# Altium PCB CH32V307V-R1-1v0.PcbDoc (part 1 of 2)
Units mil, origin at the board's own origin, x right, y up, seen from the top; angles counter-clockwise.
Board outline 2913.39 x 4072 mil, 2 copper layers (Top Layer, Bottom Layer); 76 components, 135 nets, 475 pads, 552 vias.
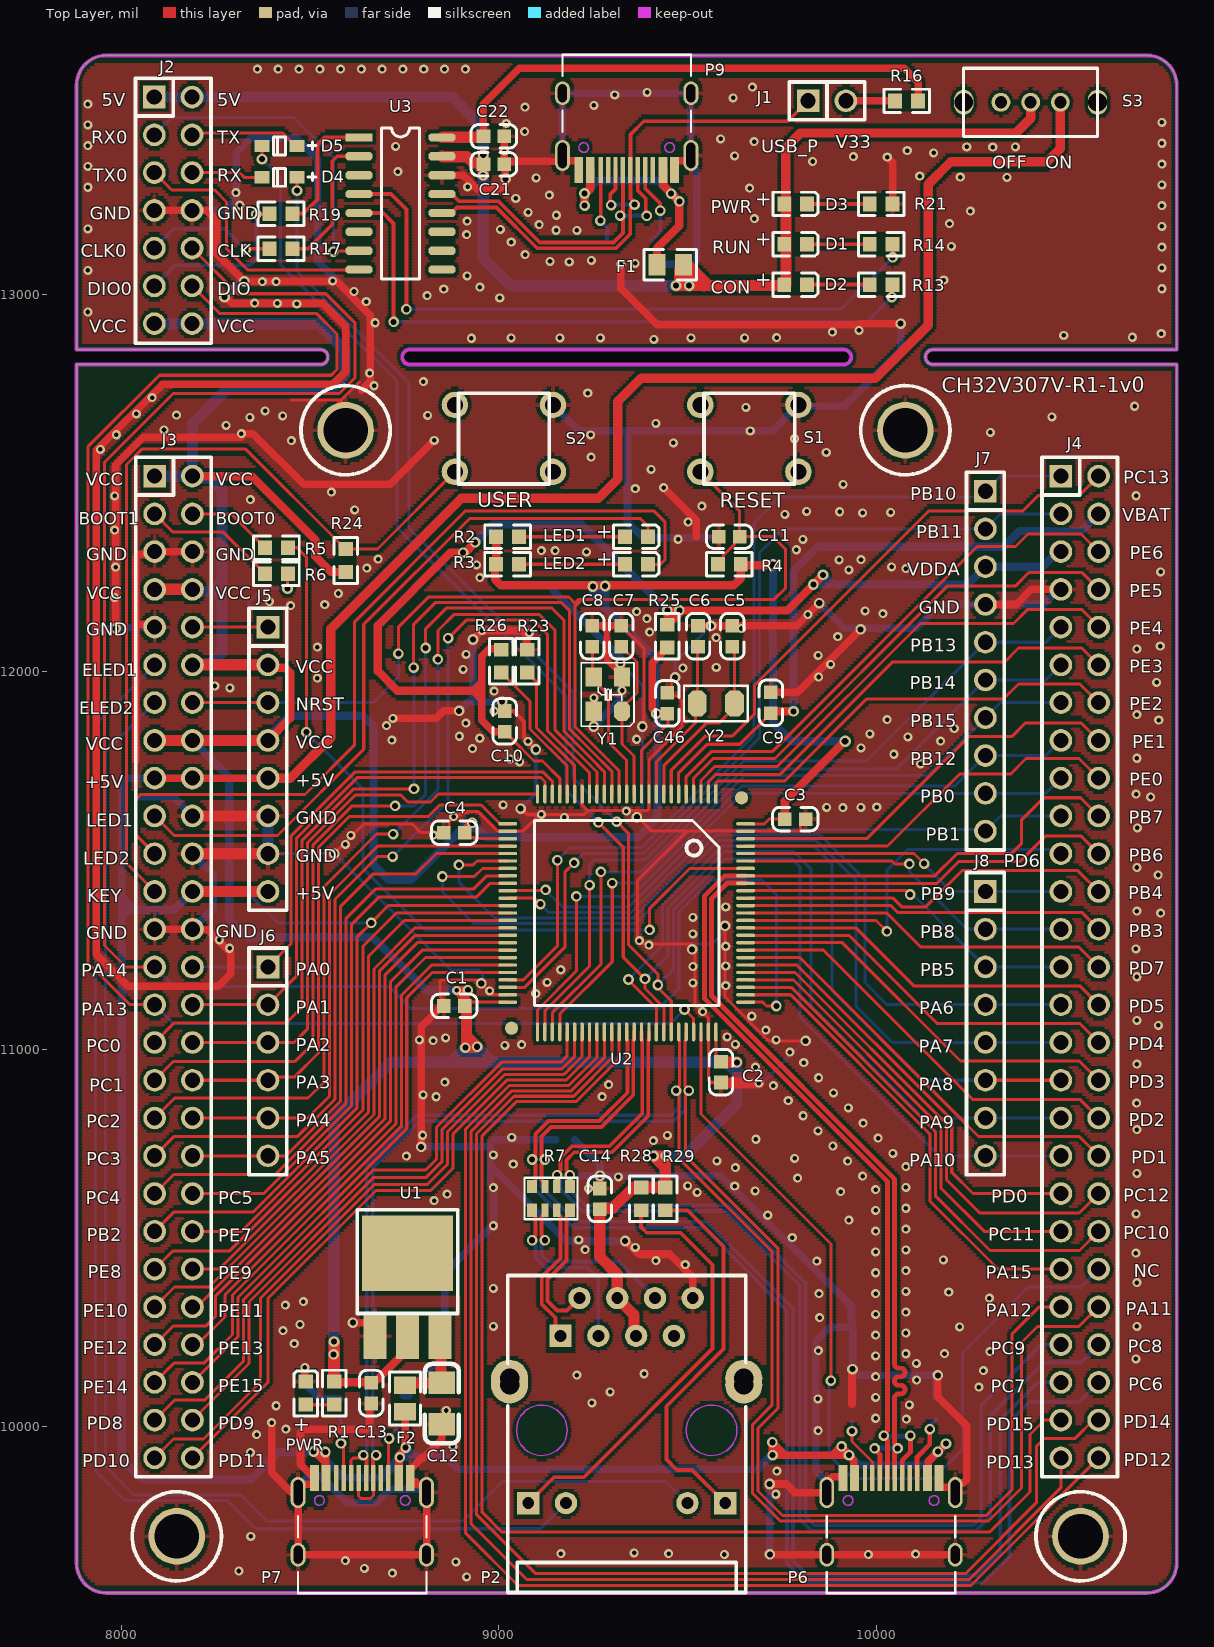
[diagram p0: Top Layer view]
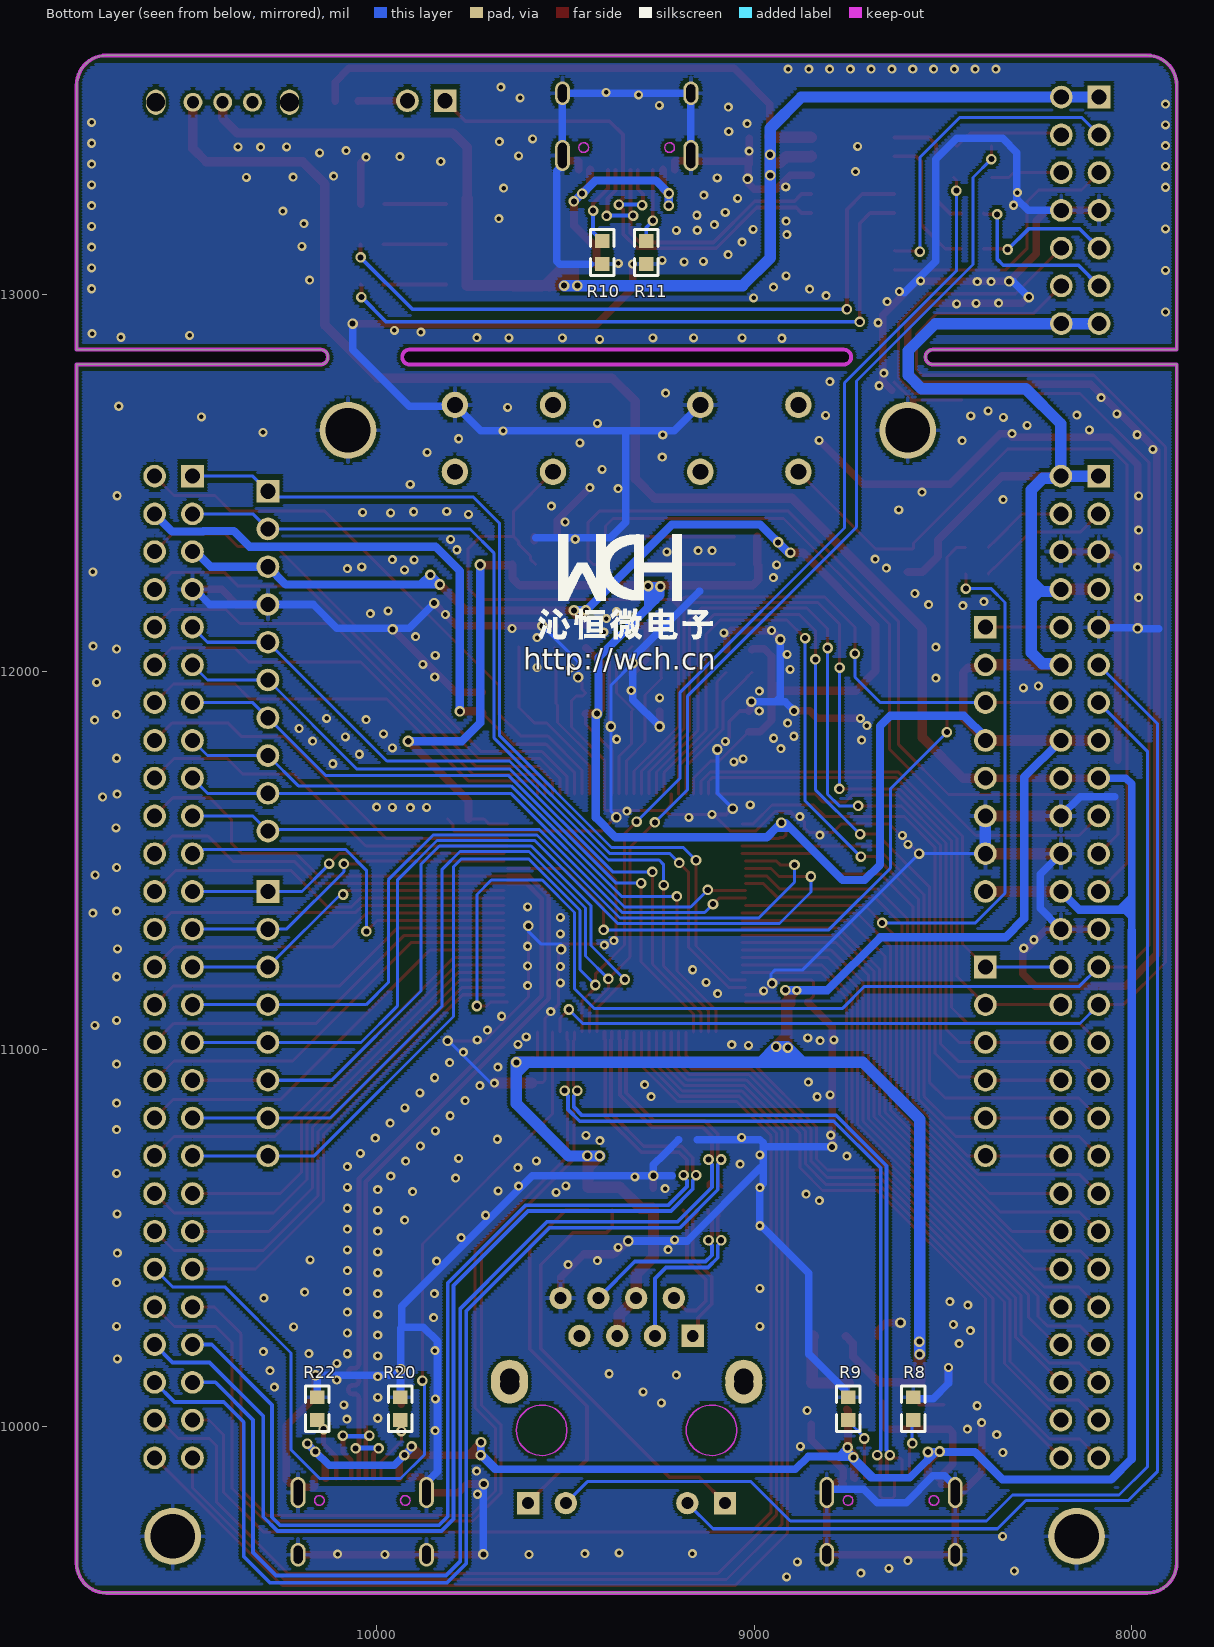
[diagram p1: Bottom Layer view, seen from below]

## Layer stack, top to bottom
Top Solder: solder mask 0.4, Solder Resist, Dk 3.5
Top Layer: signal copper 1.4
Dielectric 1: dielectric 12.6, FR-4, Dk 4.8
Bottom Layer: signal copper 1.4
Bottom Solder: solder mask 0.4, Solder Resist, Dk 3.5

## Board outline
7960.24,9560.3 cw(c7960.24,9639.04) 7881.5,9639.04 7881.5,12813.78 8527.17,12813.78 ccw(c8527.17,12833.46) 8527.17,12853.15 7881.5,12853.15 7881.5,13553.56 cw(c7960.24,13553.56) 7960.24,13632.3 10716.14,13632.3 cw(c10716.14,13553.56) 10794.88,13553.56 10794.88,12853.15 10149.21,12853.15 ccw(c10149.21,12833.46) 10149.21,12813.78 10794.88,12813.78 10794.88,9639.04 cw(c10716.14,9639.04) 10716.14,9560.3
cut-out: 8763.39,12813.78 9914.95,12813.78 9912.99,12813.68 ccw(c9912.99,12833.46) 9912.99,12853.25 9914.95,12853.15 8763.39,12853.15 ccw(c8763.39,12833.46)

## Design rules (kind name [scope] priority, off if disabled: settings)
Clearance Clearance_1 [InPolygon] p1: gap=8 ignorepadtopadclearanceinfootprint=FALSE
Clearance [All] p2: gap=5.5 ignorepadtopadclearanceinfootprint=FALSE
ComponentClearance [All] p1 off: gap=10 collisioncheckmode=3 verticalgap=10 showdistances=FALSE
DiffPairsRouting [All] p1: maxlimit=10 minlimit=5.5 mostfreqgap=8 toplayer_minwidth=6 toplayer_maxwidth=15 toplayer_prefwidth=10 bottomlayer_minwidth=6 bottomlayer_maxwidth=15 bottomlayer_prefwidth=10 maxuncoupledlength=500
MinimumSolderMaskSliver [All] p1 off: minsoldermaskwidth=10
PolygonConnect PolygonConnect_1 [IsVia] p1: connectstyle=Direct reliefconductorwidth=10 reliefentries=4 polygonreliefangle="90 Angle" airgapwidth=10
PolygonConnect [All] p2: connectstyle=Relief reliefconductorwidth=10 reliefentries=4 polygonreliefangle="90 Angle" airgapwidth=10
RoutingVias [All] p1: holewidth=16 width=28 viastyle="Through Hole" minholewidth=12 minwidth=24 maxholewidth=28 maxwidth=50
SilkToSilkClearance [All] p1 off: silktosilkclearance=10
SilkToSolderMaskClearance [IsPad] p1 off: minsilkscreentomaskgap=10 clearancetoexposedcopper=TRUE
SolderMaskExpansion [All] p1: expansion=4 istentingtop=FALSE
Width [All] p1: maxlimit=100 minlimit=6 preferedwidth=10
25 further rules are at their usual default settings.

## Classes and differential pairs
component class CH32V307V-R1-1v0: C1 C2 C3 C4 C5 C6 C7 C8 C9 C10 C11 C12 C13 C14 C21 C22 C46 D1 D2 D3 D4 D5 F1 F2 J1 J2 J3 J4 J5 J6 J7 J8 LED1 LED2 P2 P6 P7 P9 PWR R1 R2 R3 R4 R5 R6 R7 R8 R9 R10 R11 R13 R14 R16 R17 R19 R20 R21 R22 R23 R24 R25 R26 R28 R29 S1 S2 S3 U1 U2 U3 Y1 Y2
differential pair ETX: +ETXP -ETXN
differential pair ERX: +ERXP -ERXN
differential pair ERX1: +ERXP1 -ERXN1
differential pair ETX1: +ETXN1 -ETXP1
differential pair NewDifferentialPair2: +PA11 -PA12
differential pair NewDifferentialPair1: +PB6 -PB7

## Components (designator, comment, footprint, x,y, rotation, side; value= is the part's Value field where it differs from the comment)
C1 "0.1uF" 0603_C 8854.17,11114.89 r0 top
C2 "0.1uF" 0603_C 9588.03,10912.26 r90 top
C3 "0.1uF" 0603_C 9757.17,11609.89 r0 top
C4 "0.1uF" 0603_C 8854.17,11573.89 r0 top
C5 "12pF" 0603_C 9618.17,12066.71 r90 top
C6 "12pF" 0603_C 9527.17,12066.71 r90 top
C7 "20pF" 0603_C 9324.17,12121.69 r270 top
C8 "20pF" 0603_C 9247.17,12121.69 r270 top
C9 "0.1uF" 0603_C 9720.24,11945.17 r270 top
C10 "0.1uF" 0603_C 9015.02,11896.03 r270 top
C11 "0.1uF" 0603_C 9582.49,12357.58 r0 top
C12 "10uF" 3216_C 8848.89,10116.83 r90 top
C13 "2.2uF" 0603_C 8661.71,10117.14 r270 top
C14 "1uF" 0603_C 9267.28,10631.55 r270 top
C21 "0.1uF" 0603_C 8958.96,13344.22 r0 top
C22 "0.1uF" 0603_C 8958.96,13417.98 r0 top
C46 "0.1uF" 0603_C 9446.17,11888.9 r90 top
D1 "GREEN" 0603+ 9755.46,13132.07 r0 top
D2 "BLUE" 0603+ 9755.46,13025.32 r0 top
D3 "RED" 0603+ 9755.46,13238.82 r0 top
D4 "B0520" SOD-323 8465.46,13309.41 r180 top
D5 "B0520" SOD-323 8465.46,13392.36 r180 top
F1 "500mA" 0805 9418.33,13077.94 r0 top
F2 "500mA" 0805 8751.22,10040.36 r90 top
J1 "Header 2" SIP2-2.54MM 9818.79,13512.1 r90 top
J2 "Header 7X2" IDC14-2.54mm 8087.19,13522 r0 top
J3 "HEADER 27x2" IDC54-2.54MM 8088.19,12518.11 r0 top locked
J4 "HEADER 27x2" IDC54-2.54MM 10488.19,12518.11 r0 top locked
J5 "Header 8" SIP8-2.54mm 8388.19,12118.11 r0 top locked
J6 "Header 6" SIP6-2.54MM 8388.19,11218.11 r0 top locked
J7 "Header 10" SIP10-2.54mm 10288.19,12478.11 r0 top locked
J8 "Header 8" SIP8-2.54mm 10288.19,11418.11 r0 top locked
LED1 "LED1   blue" 0603+ 9333.89,12357.58 r0 top
LED2 "LED2  blue" 0603+ 9333.89,12284.43 r0 top
P2 "HR911105A" HR911105A 9163.19,10241.2 r0 top
P6 "USBHS" TYPE-C-Receptacle-2.0 10038.31,9864.31 r0 top
P7 "USBFS" TYPE-C-Receptacle-2.0 8638.07,9864.31 r0 top
P9 "TYPE-C" TYPE-C-Receptacle-2.0 9338.19,13329.24 r180 top
PWR "POWER  red" 0603+ 8488.6,10059.33 r90 top
R1 "1K" 0603 8563.58,10059.33 r90 top
R2 "1K" 0603 8992.46,12357.58 r0 top
R3 "1K" 0603 8992.46,12284.43 r0 top
R4 "10K" 0603 9579.67,12284.43 r0 top
R5 "10K" 0603 8380.33,12328.46 r0 top
R6 "10K" 0603 8440.96,12259.29 r180 top
R7 "0Ω" RCA-8P4R-0603 9137.7,10605.1 r180 top
R8 "NC(5.1K)" 0603 8578.92,10078.77 r270 bottom
R9 "NC(5.1K)" 0603 8751.9,10078.77 r270 bottom
R10 "NC(5.1K)" 0603 9402.41,13140.64 r270 bottom
R11 "NC(5.1K)" 0603 9286.47,13140.64 r270 bottom
R13 "1K" 0603 10042.48,13025.32 r180 top
R14 "10K" 0603 10042.48,13132.07 r180 top
R16 "4.7K" 0603 10049.21,13511.61 r0 top
R17 "270" 0603 8392.31,13120.22 r0 top
R19 "270" 0603 8392.31,13213.47 r0 top
R20 "NC(5.1K)" 0603 9937.83,10078.77 r270 bottom
R21 "1K" 0603 10042.48,13238.82 r180 top
R22 "NC(5.1K)" 0603 10157.21,10078.77 r270 bottom
R23 "0R" 0603 9074.6,12058.4 r270 top
R24 "10K" 0603 8593.69,12324.84 r270 top
R25 "0R" 0603 9446.17,12063.89 r90 top
R26 "0R" 0603 9006.35,12058.4 r270 top
R28 "1K" 0603 9376.51,10634.37 r270 top
R29 "1K" 0603 9440.75,10634.37 r270 top
S1 "RESET" KEYX 9533.27,12529.53 r90 top locked
S2 "USER" KEYX 8883.27,12529.53 r90 top locked
S3 "SW" KEY2 10250.62,13508.22 r0 top
U1 "1117-3.3V" SOT-223 8671.73,10240.25 r0 top
U2 "CH32V307V" LQFP100 9574.41,11676.04 r180 top locked
U3 "CH549G" SOP16 8629.36,13415.06 r270 top
Y1 "8M" XT3225 9325.98,11895.34 r90 top
Y2 "32.768k" FC-135 9623.6,11915.89 r180 top
? "Comment" HOLE 8593.78,12639.72 r0 top
? "Comment" HOLE 10076.22,12639.72 r0 top
? "Comment" HOLE 8146.7,9710.31 r0 top
? "Comment" HOLE 10540.23,9710.31 r0 top

## Footprints (in the part's own frame and the unit in brackets; to place one, negate y for a bottom-side part, rotate by r counter-clockwise, add the part's x,y. Pads: shape width x height; smd on the part's side, far side on the other; paste and mask are expansions set on the pad)
0603 [mm]
  rect 0.93x0.98 smd: 1(0,0) 2(1.54,0)
  silkscreen extent -0.76,-0.79 2.3,0.79
0603+ [mm]
  rect 0.93x0.98 smd: 1(0,0) 2(1.54,0)
  silkscreen extent -0.76,-0.79 2.27,0.79
0603_C [mil]
  rect 36x36 smd: 1(0,0) 2(55,0)
  silkscreen extent -33,-31 88,31
0805 [mm]
  rect 1.16x1.47 smd: 1(0,0) 2(1.78,0)
  silkscreen extent -0.88,-1.04 2.66,1.03
3216_C [mil]
  rect 60x70 smd: 1(0,0) 2(-110,0)
  silkscreen extent -160,-45 50,45
FC-135 [mil]
  oct 50x70 smd: 1(0,0) 2(98.43,0)
  silkscreen extent -35,-47 133,47
HOLE [mm]
  round 3.81 hole 3: 0(0,0)
  silkscreen extent -3,-3 3,3
HR911105A [mm]
  rect 1.5x1.5 hole 0.8: 1(0,0) 9(-2.175,-11.252) 12(11.075,-11.252)
  round 1.5 hole 0.8: 2(1.27,2.54) 3(2.54,0) 4(3.81,2.54) 5(5.08,0) 6(6.35,2.54) 7(7.62,0) 8(8.89,2.54) 10(0.365,-11.252) 11(8.535,-11.252)
  round 2.5 hole 1.3: ""(-3.43,-2.852) ""(-3.43,-3.3) ""(12.32,-3.3) ""(12.32,-2.852)
  Keep-Out Layer circle w0.1: c-1.265,-6.352 r1.7
  Keep-Out Layer circle w0.1: c10.165,-6.352 r1.7
  silkscreen extent -3.55,-17.27 12.45,4.06
IDC14-2.54mm [mil]
  rect 60x60 hole 40: 1(0,0)
  round 60 hole 40: 2(100,0) 3(0,-100) 4(100,-100) 5(0,-200) 6(100,-200) 7(0,-300) 8(100,-300) 9(0,-400) 10(100,-400) 11(0,-500) 12(100,-500) 13(0,-600) 14(100,-600)
  silkscreen extent -50,-652 151,50
IDC54-2.54MM [mil]
  rect 60x60 hole 40: 1(0,0)
  round 60 hole 40: 2(100,0) 3(0,-100) 4(100,-100) 5(0,-200) 6(100,-200) 7(0,-300) 8(100,-300) 9(0,-400) 10(100,-400) 11(0,-500) 12(100,-500) 13(0,-600) 14(100,-600) 15(0,-700) 16(100,-700) 17(0,-800) 18(100,-800) 19(0,-900) 20(100,-900) 21(0,-1000) 22(100,-1000) 23(0,-1100) 24(100,-1100) 25(0,-1200) 26(100,-1200) 27(0,-1300) 28(100,-1300) 29(0,-1400) 30(100,-1400) 31(0,-1500) 32(100,-1500) 33(0,-1600) 34(100,-1600) 35(0,-1700) 36(100,-1700) 37(0,-1800) 38(100,-1800) 39(0,-1900) 40(100,-1900) 41(0,-2000) 42(100,-2000) 43(0,-2100) 44(100,-2100) 45(0,-2200) 46(100,-2200) 47(0,-2300) 48(100,-2300) 49(0,-2400) 50(100,-2400) 51(0,-2500) 52(100,-2500) 53(0,-2600) 54(100,-2600)
  silkscreen extent -50,-2650 150,50
KEY2 [mm]
  oval 1.3x1.7 hole 1.27: 0(-0.5,0) 0(8.5,0)
  round 1.27 hole 0.813: 1(4,0) 2(2,0) 3(6,0)
  silkscreen extent -0.51,-2.31 8.5,2.29
KEYX [mil]
  round 70 hole 42: 1(0,0) 2(0,-259.84) 3(177.17,-259.84) 4(177.17,0)
  silkscreen extent -32,-250 208,-10
LQFP100 [mm]
  round 0.889 smd: 0(-1.727,0.254) 0(13.746,15.748)
  rect 0.229x1.27 smd: 1(0,0)
  oval 0.229x1.27 smd: 2(0.5,0) 3(1,0) 4(1.5,0) 5(2,0) 6(2.5,0) 7(3,0) 8(3.5,0) 9(4,0) 10(4.5,0) 11(5,0) 12(5.5,0) 13(6,0) 14(6.5,0) 15(7,0) 16(7.5,0) 17(8,0) 18(8.5,0) 19(9,0) 20(9.5,0) 21(10,0) 22(10.5,0) 23(11,0) 24(11.5,0) 25(12,0) 51(12,16) 52(11.5,16) 53(11,16) 54(10.5,16) 55(10,16) 56(9.5,16) 57(9,16) 58(8.5,16) 59(8,16) 60(7.5,16) 61(7,16) 62(6.5,16) 63(6,16) 64(5.5,16) 65(5,16) 66(4.5,16) 67(4,16) 68(3.5,16) 69(3,16) 70(2.5,16) 71(2,16) 72(1.5,16) 73(1,16) 74(0.5,16) 75(0,16)
  oval 1.27x0.229 smd: 26(14,2) 27(14,2.5) 28(14,3) 29(14,3.5) 30(14,4) 31(14,4.5) 32(14,5) 33(14,5.5) 34(14,6) 35(14,6.5) 36(14,7) 37(14,7.5) 38(14,8) 39(14,8.5) 40(14,9) 41(14,9.5) 42(14,10) 43(14,10.5) 44(14,11) 45(14,11.5) 46(14,12) 47(14,12.5) 48(14,13) 49(14,13.5) 50(14,14) 76(-2,14) 77(-2,13.5) 78(-2,13) 79(-2,12.5) 80(-2,12) 81(-2,11.5) 82(-2,11) 83(-2,10.5) 84(-2,10) 85(-2,9.5) 86(-2,9) 87(-2,8.5) 88(-2,8) 89(-2,7.5) 90(-2,7) 91(-2,6.5) 92(-2,6) 93(-2,5.5) 94(-2,5) 95(-2,4.5) 96(-2,4) 97(-2,3.5) 98(-2,3) 99(-2,2.5) 100(-2,2)
  silkscreen extent -0.22,1.79 12.21,14.21
RCA-8P4R-0603 [mm]
  rect 0.65x0.9 smd: 1(-1.28,-0.8) 4(1.28,-0.8) 5(1.28,0.8) 8(-1.28,0.8)
  rect 0.5x0.9 smd: 2(-0.4,-0.8) 3(0.4,-0.8) 6(0.4,0.8) 7(-0.4,0.8)
  silkscreen extent -1.78,-1.4 1.78,1.4, body extent -1.6,-0.8 1.6,0.8, height 0.6
SIP2-2.54MM [mil]
  rect 60x60 hole 40: 1(0,0)
  round 60 hole 40: 2(0,-100)
  silkscreen extent -50,-150 50,50
SIP6-2.54MM [mil]
  rect 60x60 hole 40: 1(0,0)
  round 60 hole 40: 2(0,-100) 3(0,-200) 4(0,-300) 5(0,-400) 6(0,-500)
  silkscreen extent -50,-550 50,50
SIP8-2.54mm [mil]
  rect 60x60 hole 40: 1(0,0)
  round 60 hole 40: 2(0,-100) 3(0,-200) 4(0,-300) 5(0,-400) 6(0,-500) 7(0,-600) 8(0,-700)
  silkscreen extent -50,-750 50,50
SIP10-2.54mm [mil]
  rect 60x60 hole 40: 1(0,0)
  round 60 hole 40: 2(0,-100) 3(0,-200) 4(0,-300) 5(0,-400) 6(0,-500) 7(0,-600) 8(0,-700) 9(0,-800) 10(0,-900)
  silkscreen extent -50,-950 50,50
SOD-323 [mm]
  rect 1x0.83 smd: 1(0,0) 2(2.36,0)
  silkscreen extent -1.28,-0.6 1.58,0.6
SOP16 [mil]
  rect 22x72 smd: 1(0,0)
  oct 22x72 smd: 2(50,0) 3(100,0) 4(150,0) 5(200,0) 6(250,0) 7(300,0) 8(350,0) 9(350,220) 10(300,220) 11(250,220) 12(200,220) 13(150,220) 14(100,220) 15(50,220) 16(0,220)
  silkscreen extent -25,60 375,160
SOT-223 [mil]
  rect 60x120 smd: 1(0,0) 2(86,0) 3(172,0)
  rect 240x200 smd: ""(86,220)
  silkscreen extent -47,60 219,335
TYPE-C-Receptacle-2.0 [mm]
  oval 1x1.6 hole 0.6 slot 1.2 at 90 deg: 0(-4.32,-5.15) 0(4.32,-5.15)
  oval 1x2.1 hole 0.6 slot 1.7 at 90 deg: 0(-4.32,-0.97) 0(4.32,-0.97)
  rect 0.6x1.75 smd: A1(-3.225,0) A4(-2.45,0) B1(3.225,0) B4(2.45,0)
  rect 0.3x1.75 smd: A5(-1.25,0) A6(-0.25,0) A7(0.25,0) A8(1.25,0) B5(1.75,0) B6(0.75,0) B7(-0.75,0) B8(-1.75,0)
  Keep-Out Layer circle w0.1: c2.89,-1.5 r0.325
  Keep-Out Layer circle w0.1: c-2.89,-1.5 r0.325
  silkscreen extent -4.32,-7.75 4.32,-2.55
XT3225 [mm]
  oct 1.3x1.1 smd: 1(0,0)
  rect 1.3x1.1 smd: 2(2.3,0) 3(2.3,1.9) 4(0,1.9)
  silkscreen extent -1.02,-0.8 3.27,2.74

## Part data
C1 C2 C3 C4 C9 C10 C12 C13 C14 C46: library part CAP, "Capacitor"
C5 C6 C7 C8 C11: library part Cap, "Capacitor"
C21 C22: library part C0603, "Capacitor", LatestRevisionDate=17-Jul-2002, LatestRevisionNote="Re-released for DXP Platform.", PackageDescription="Radial Cap, Thru-Hole; 2 Leads; 0.3 in Pin Spacing", PackageReference=RAD-0.3, Published=8-Jun-2000, Publisher="Altium Limited"
D1 D2 D3: library part D0603, "Typical RED, GREEN, YELLOW, AMBER GaAs LED", LatestRevisionDate=17-Jul-2002, LatestRevisionNote="Re-released for DXP Platform.", PackageDescription="SM LED; 2 Flat Leads", PackageReference=3.2X1.6X1.1, PackageVersion=Feb-2002, Published=8-Jun-2000, Publisher="Altium Limited"
D4 D5: library part DIODE, "Diode"
F1 F2: library part FUSE1, "Fuse"
J1: "Header, 2-Pin", LatestRevisionDate=17-Jul-2002, LatestRevisionNote="Re-released for DXP Platform.", Publisher="Altium Limited"
J2: "Header, 7-Pin, Dual row", LatestRevisionDate=17-Jul-2002, LatestRevisionNote="Re-released for DXP Platform.", Publisher="Altium Limited"
J3 J4: "Header, 27-Pin, Dual row"
J5 J8: "Header, 8-Pin", LatestRevisionDate=17-Jul-2002, LatestRevisionNote="Re-released for DXP Platform.", Publisher="Altium Limited"
J6: "Header, 6-Pin", LatestRevisionDate=17-Jul-2002, LatestRevisionNote="Re-released for DXP Platform.", Publisher="Altium Limited"
J7: "Header, 10-Pin", LatestRevisionDate=17-Jul-2002, LatestRevisionNote="Re-released for DXP Platform.", Publisher="Altium Limited"
LED1 LED2 PWR: library part LED0, "Typical INFRARED GaAs LED", LatestRevisionDate=08-Jul-2005, LatestRevisionNote="Mech Layer 1 removed.", PackageReference=LED-0, Published=8-Jun-2000, Publisher="Altium Limited"
P6 P7 P9: library part TYPE-C1
R1 R2 R3: library part "Res Semi", "Semiconductor Resistor"
R4 R5 R6 R8 R9 R10 R11 R20 R22 R24: library part Res2, "Resistor"
R7: library part R-8P4R, "贴片网络排阻", BOM名称=贴片网络排阻, 学习资源=www.ooocke.com, 版权归属=源创客
R13 R14 R16 R17 R19 R21: library part R0603, "Resistor", LatestRevisionDate=17-Jul-2002, LatestRevisionNote="Re-released for DXP Platform.", PackageDescription="Axial Device, Thru-Hole; 2 Leads; 0.3 in Pin Spacing", PackageReference=AXIAL-0.3, Published=8-Jun-2000, Publisher="Altium Limited"
R23 R25 R26: library part R
R28 R29: library part RES
S1 S2: library part "SW PUSHBUTTON", "SE PUSHBUTTON"
U2: "RISC-V FPU MCU, 144MHz, USB_480M，USB OTG,1000M Ethernet MAC, 2*CAN"
U3: "8bit MCS51 MCU with ADC & USB type-C host & device & dual UART & SPI"
Y1 Y2: library part XTAL, "Crystal Oscillator", LatestRevisionDate=17-Jul-2002, LatestRevisionNote="Re-released for DXP Platform.", PackageReference=R38, Published=8-Jun-2000, Publisher="Altium Limited"

## Via types
v1: diameter 24, hole 12, Top Layer to Bottom Layer, tented both sides, 414 vias
v2: diameter 28, hole 16, Top Layer to Bottom Layer, tented both sides, 136 vias
v3: diameter 30, hole 18, Top Layer to Bottom Layer, tented both sides, 2 vias

## Nets (pads, with @x,y where several pads share a name; then routed paths per layer and width w, separated by ;. In a path a pad name is that pad's centre, name@x,y a point inside that pad or via, vN(x,y) a via of type N, cw(c..) or ccw(c..) an arc to the next point about the centre after c; other vN are vias at no path point)
5V: C21.1 D1.1 D2.1 D3.1 F1.2 J2.1 J2.2 S3.1 U3.15 | length 3722
  Top Layer w25: D3.1@9760.03,13253.45 9760.03,13388.54 9798.31,13426.82 10369.41,13426.82 10408.1,13465.5 S3.1@10408.1,13508.22
  Top Layer w30: U3.15@8849.36,13365.06 8850.39,13364.03 8915.36,13364.03 8932.18,13347.22 8955.96,13347.22 C21.1@8957.96,13345.22 ; v2(8957.96,13314.42) C21.1@8957.96,13343.23 ; v2(8958.42,13369.17) 8957.96,13368.71 C21.1@8957.96,13345.22 ; v2(9468.77,13022.53) v2@9469.19,13022.96 ; 9484.12,13037.88 9484.12,13065.59 F1.2@9491.95,13073.43 ; v2(9503.72,13022.55) v2@9503.72,13022.96 ; 9503.72,13037.1 v2@9503.72,13031.43 ; 9563.77,13022.53 9637.73,13022.53 ; D3.1@9760.03,13253.45 9760.03,13138.2 9760.03,13022.96 9554.63,13022.96 ; C21.1@8957.96,13343.23 C21.1@8957.96,13345.22 ; C21.1@8957.96,13343.23 C21.1@8958.96,13344.22 C21.1@8957.96,13345.22 ; v2@9469.19,13022.96 v2@9503.72,13022.96 ; v2@9469.19,13022.96 9479.12,13032.88 9479.12,13065.59 9486.95,13073.43 F1.2@9491.95,13073.43 ; F1.2@9491.95,13073.43 9493.06,13073.43 F1.2@9498.06,13073.43 ; F1.2@9498.06,13073.43 9504.16,13073.43 9542.73,13034.85 ; F1.2@9498.06,13073.43 9501.38,13070.1 9501.38,13033.77 v2@9503.72,13031.43 ; v2@9503.72,13022.96 v2@9512.2,13022.96 ; v2@9503.72,13022.96 v2@9503.72,13031.43 ; v2@9503.72,13031.43 v2@9512.2,13022.96 ; v2@9512.2,13022.96 9542.73,13022.96 ; 9542.73,13022.96 9543.16,13022.96 ; 9542.73,13022.96 9542.73,13034.85 ; 9542.73,13022.96 9542.73,13022.53 9543.16,13022.96 ; 9542.73,13034.85 9554.63,13022.96 ; 9543.16,13022.96 9554.63,13022.96
  Bottom Layer w30: J2.1@8087.19,13522 J2.2@8187.19,13522 8875.41,13522 8957.96,13439.44 v2(8957.96,13314.42) 8957.96,13095.71 9031.12,13022.55 v2(9503.72,13022.55)
5V_USB: F1.1 P9.A4 P9.B4 | length 727.3
  Top Layer w22: v2(9226.58,13266.5) 9227.73,13267.64 9230.45,13267.64 9241.73,13278.93 P9.B4@9241.73,13329.24 ; v2(9226.75,13234.23) v2@9226.75,13266.5 ; F1.1@9418.33,13077.94 9418.33,13122.08 9477.78,13181.53 v2(9477.78,13246) 9476.88,13246 9457.95,13264.94 9457.05,13264.94 v2(9455.9,13266.08) 9455.9,13267.71 9435.46,13288.15 9435.46,13328.43 P9.A4@9434.65,13329.24
  Bottom Layer w22: v2(9226.58,13266.5) v2@9226.75,13266.67 ; v2(9226.75,13234.23) v2@9226.75,13266.67 ; v2@9447.49,13272.04 v2@9449.94,13272.04 ; v2@9451.75,13272.04 v2(9477.78,13246) ; v2(9455.9,13266.08) v2@9449.94,13272.04 ; v2@9226.75,13266.67 9260.88,13300.79 9421.19,13300.79 v2@9449.94,13272.04
+5V: F2.1 J3.17 J3.18 J3.24 J5.5 J5.8 P6.A4 P6.B4 P7.A4 P7.B4 S3.3 | length 9527.6
  Top Layer w20: J3.17@8088.19,11718.11 J3.18@8188.19,11718.11 J5.5@8388.19,11718.11 ; v2(8509.23,9934.97) 8510.66,9934.97 8539.81,9905.83 ; v2@8512.09,9934.28 8539.48,9934.28 v2(8540.17,9933.58) 8540.89,9932.86 P7.A4@8540.89,9865.03 ; 8539.81,9909.12 8539.81,9905.83 ; P7.A4@8541.62,9864.31 P7.A4@8540.89,9865.03 ; v2(8737.76,9919.26) 8736.34,9917.84 8736.34,9866.12 P7.B4@8734.53,9864.31 8734.53,9925.11 8752.75,9943.33 v2(8752.75,9945.49) 8751.98,9946.26 8751.98,10043.5 F2.1@8754.88,10046.39 ; v2(9723.98,9959.44) v2@9724.44,9958.98 ; P6.A4@9941.85,9864.31 9940.04,9866.12 9940.04,9911.59 9927.06,9924.57 v2(9927.06,9925.39) ; P6.B4@10134.77,9864.31 10136.58,9866.12 10136.58,9907.65 ; v2(10162.43,9934.68) 10136.58,9908.82 10136.58,9907.65 ; v2(10184,9956) 10184,9955.07 10136.58,9907.65 ; 8539.81,9905.83 8539.81,9866.12 P7.A4@8540.89,9865.03 ; v2@9724.44,9958.98 9757.93,9925.49 ; v2@9724.44,9958.98 9724.44,9925.95 v2(9724.9,9925.49) 9757.93,9925.49 ; 9757.93,9925.49 9882.45,9925.49 ; 9882.45,9925.49 9926.96,9925.49 v2(9927.06,9925.39) ; 9882.45,9925.49 9905.39,9948.43 v2(9907.56,9948.43) 9907.56,9946.66 9927.06,9927.16 v2(9927.06,9925.39)
  Top Layer w25: J5.5@8388.19,11718.11 8447.22,11718.11 8554.83,11825.72 8554.83,12113.72 8900.51,12459.4 9263.58,12459.4 9315.12,12510.94 9315.12,12716.19 9376.31,12777.38 9996.85,12777.38 10137.45,12917.98 10137.45,13291.4 10196.53,13350.48 10451.5,13350.48 10486.84,13385.81 S3.3@10486.84,13508.22
  Top Layer w30: J3.24@8188.19,11418.11 J5.8@8388.19,11418.11
  Bottom Layer w20: 8000.75,11314.66 8000.75,11351.37 ; 8033.82,11369.98 8000.75,11403.05 ; J3.17@8088.19,11718.11 8087.85,11718.45 8016.2,11718.45 8000.75,11702.99 8000.75,11403.05 ; v2(8540.17,9933.58) 8540.17,9913.36 8588.12,9865.41 8691.69,9865.41 v2@8742.47,9916.2 ; 8686.03,9867.53 v2(8737.76,9919.26) ; v2(8752.75,9945.49) 8753.15,9945.49 v2@8756.55,9942.1 ; 8776.99,9919.26 v2(8737.76,9919.26) ; v2@9723.98,9936.06 9724.44,9936.52 9724.44,9958.98 v2(9723.98,9959.44) ; v2(9724.9,9925.49) v2@9720.9,9921.49 ; v2(9907.56,9948.43) 9907.56,9946.27 9910.5,9943.32 9910.5,9941.94 v2(9927.06,9925.39) 9953.88,9898.56 10126.31,9898.56 v2(10162.43,9934.68) 10162.68,9934.68 v2(10184,9956) ; 8000.75,11351.37 8000.75,11388.59 ; 8000.75,11351.37 8019.36,11369.98 8000.75,11388.59 ; 8000.75,11388.59 8000.75,11403.05 ; v2(8737.76,9919.26) 8737.76,9921.42 8756.55,9940.21 v2@8756.55,9942.1 ; v2@8756.55,9942.1 8776.99,9921.65 8857.24,9921.65 8891.13,9887.76 9682.27,9887.76 ; 9682.27,9887.76 9687.17,9887.76 v2@9720.9,9921.49 ; 9682.27,9887.76 9716,9921.49 v2@9720.9,9921.49
  Bottom Layer w22: 8000.75,11314.66 8000.75,9914.7 8054.82,9860.62 8343.32,9860.62 8416.28,9933.58 v2@8519.95,9933.58 ; 8019.36,11369.98 8033.82,11369.98 8140.06,11369.98 J3.24@8188.19,11418.11 ; 8540.17,9913.36 v2@8519.95,9933.58 ; v2(8540.17,9933.58) v2@8519.95,9933.58
BOOT0: R5.2 U2.94 | length 2126.8
  Top Layer w8: R5.2@8440.96,12328.46 8465.06,12328.46 8490,12303.52 v2(8490,11840) ; v2(9399.06,11316.56) 9399.06,11373.4 9504.85,11479.19 U2.94@9653.15,11479.19
  Bottom Layer w8: v2(8490,11840) 8639.57,11690.43 8639.57,11479.92 8802.92,11316.56 v2(9399.06,11316.56)
BOOT1: J3.41 R6.1 U2.37 | length 2844.9
  Top Layer w8: J3.41@8088.19,10518.11 8138.81,10568.73 8348.32,10568.73 8623.52,10843.92 8623.52,11296.64 v2(8661.72,11334.84) 8661.72,11335.59 8706.9,11380.76 U2.37@9023.23,11380.76 ; v2(8440,12220) 8440,12258.33 R6.1@8440.96,12259.29
  Bottom Layer w8: v2(8440,12220) 8372.58,12220 8336.08,12183.5 8336.08,11413.65 8414.89,11334.84 v2(8661.72,11334.84)
CLK: J2.10 J3.27 U2.76 | length 5198.6
  Top Layer w8: J3.27@8088.19,11218.11 8012.02,11218.11 7955.27,11274.86 7955.27,12554.56 8137.4,12736.68 8576.87,12736.68 8618.33,12778.15 8618.33,12924.38 8541.63,13001.08 8308.11,13001.08 J2.10@8187.19,13122 ; U2.76@9653.15,11124.86 9698.54,11124.86 9708.61,11114.79 v2(9734.68,11114.79)
  Bottom Layer w8: J3.27@8088.19,11218.11 8139.47,11166.83 8708.02,11166.83 8766.07,11108.78 9424.82,11108.78 9476.16,11160.12 9476.16,11362.28 9562.06,11448.18 9696.61,11448.18 9734.68,11410.12 v2(9734.68,11114.79)
CLK0: J2.9 R17.1 | length 349.8
  Top Layer w10: v2(8329.14,13118.19) 8331.17,13120.22 R17.1@8392.31,13120.22
  Bottom Layer w10: J2.9@8087.19,13122 8138.16,13172.97 8274.36,13172.97 v2(8329.14,13118.19)
D_SWCLK: R17.2 U3.2 | length 375.9
  Top Layer w10: R17.2@8452.94,13120.22 8494.28,13120.22 8558.6,13184.54 8558.6,13351.87 8571.79,13365.06 U3.2@8629.36,13365.06
D_SWDIO: R19.2 U3.1 | length 345.1
  Top Layer w10: R19.2@8452.94,13213.47 8481.72,13213.47 8519.1,13250.86 8519.1,13396.19 8537.98,13415.06 U3.1@8629.36,13415.06
DIO: J2.12 J3.29 U2.72 | length 4372.3
  Top Layer w8: J3.29@8088.19,11118.11 8022.71,11118.11 7911.13,11229.69 7911.13,12595.67 8100.7,12785.25 8555.46,12785.25 8570.8,12800.59 8570.8,12894.52 8516.13,12949.19 8260,12949.19 J2.12@8187.19,13022 ; v2(9491.4,11105.43) 9515.36,11081.48 U2.72@9515.36,11046.12
  Bottom Layer w8: J3.29@8088.19,11118.11 8137.59,11068.71 9454.68,11068.71 v2(9491.4,11105.43)
DIO0: J2.11 R19.1 | length 454
  Top Layer w10: v2(8357.01,13211.41) 8390.25,13211.41 R19.1@8392.31,13213.47
  Bottom Layer w10: J2.11@8087.19,13022 8141.76,13076.57 8340.86,13076.57 8357.01,13092.72 v2(8357.01,13211.41)
ELED1: J3.11 P2.10 | length 3537.2
  Bottom Layer w8: J3.11@8088.19,12018.11 7931.83,11861.75 7931.83,9882.63 8009.54,9804.92 8281.19,9804.92 8355.79,9730.32 9109.68,9730.32 P2.10@9177.56,9798.21
ELED2: J3.13 P2.11 | length 3743.9
  Bottom Layer w8: J3.13@8088.19,11918.11 7958.36,11788.27 7958.36,9895.46 8034.28,9819.54 8316.36,9819.54 8385.22,9750.67 8904.7,9750.67 9008.96,9854.94 9442.48,9854.94 P2.11@9499.21,9798.21
ERXN: J4.49 R7.3 U2.64 | length 3286.1
  Top Layer w10: v2@9112.38,10708.3 9112.38,10769.15 9137.61,10794.38 9271.48,10794.38 9355.78,10878.69 9355.78,11024.53 9357.88,11026.62 U2.64@9357.88,11046.12 ; v2(9121.38,10708.3) 9121.38,10703.61 9112.38,10694.61 9112.38,10669.44 9112.38,10653.71 9116.77,10649.32 9117.11,10649.32 9121.95,10644.47 R7.3@9121.95,10636.6
  Bottom Layer w10: v2(9121.38,10708.3) 9121.38,10703.61 9112.38,10694.61 9112.38,10634.52 9203.75,10543.15 9549.11,10543.15 9632.3,10459.96 9778.63,10313.64 9778.63,9644.61 9816.77,9606.46 10266.85,9606.46 10327.82,9667.44 10327.82,10018.41 10427.52,10118.11 J4.49@10488.19,10118.11
ERXN1: P2.6 R7.6 | length 478.5
  Top Layer w10: v2(9121.38,10494.41) 9121.38,10499.09 9112.38,10508.09 9112.38,10542.89 9112.38,10556.5 9116.77,10560.89 9117.11,10560.89 9121.95,10565.73 R7.6@9121.95,10573.61
  Bottom Layer w10: v2(9121.38,10494.41) 9121.38,10489.72 9112.38,10480.72 9112.38,10454.5 9129.1,10437.77 9316.62,10437.77 P2.6@9413.19,10341.2
ERXP: J4.50 R7.4 U2.63 | length 3423.8
  Top Layer w10: R7.4@9087.31,10636.6 9095.1,10644.4 9095.1,10651.93 9096.88,10653.71 9096.88,10675.86 9096.88,10694.61 9087.88,10703.61 v2(9087.88,10708.3) ; v2@9096.88,10708.3 9096.88,10775.57 9131.19,10809.88 9265.06,10809.88 9340.28,10885.11 9340.28,11024.53 9338.19,11026.62 U2.63@9338.19,11046.12
  Bottom Layer w10: v2(9087.88,10708.3) 9087.88,10703.61 9096.88,10694.61 9096.88,10628.1 9197.33,10527.65 9542.69,10527.65 9610.38,10459.96 9763.13,10307.22 9763.13,9638.19 9813.98,9587.34 10282.79,9587.34 10352.33,9656.88 10352.33,10012.62 10405.4,10065.69 10535.77,10065.69 J4.50@10588.19,10118.11
ERXP1: P2.3 R7.5 | length 477.9
  Top Layer w10: R7.5@9087.31,10573.61 9095.1,10565.81 9095.1,10558.28 9096.88,10556.5 9096.88,10536.47 9096.88,10508.09 9087.88,10499.09 v2(9087.88,10494.41)
  Bottom Layer w10: v2(9087.88,10494.41) 9087.88,10489.72 9096.88,10480.72 9096.88,10448.08 9122.71,10422.25 9234.02,10422.25 9263.19,10393.08 P2.3@9263.19,10241.2
ETXN: J4.47 R7.1 U2.66 | length 2964.7
  Top Layer w10: 9178.52,10680.75 9178.52,10706.5 9199.61,10727.59 9299.17,10727.59 9395.15,10823.57 9395.15,11024.53 9397.25,11026.62 U2.66@9397.25,11046.12
  Bottom Layer w10: v2(9187.52,10667.06) 9187.52,10662.38 9178.52,10653.38 9178.52,10636.4 9227.55,10587.37 9605.63,10587.37 9812.06,10380.94 9812.06,9762.36 9834.78,9739.64 10256.42,9739.64 10277.42,9760.64 10277.42,10058.32 10437.21,10218.11 J4.47@10488.19,10218.11
ETXN1: P2.2 R7.8 | length 373.4
  Top Layer w10: R7.8@9188.1,10573.61 9180.3,10565.81 9180.3,10558.28 9178.52,10556.5 9178.52,10440.52 9128.52,10390.52 9128.52,10333.79 9154.04,10308.27 9180.35,10308.27 9213.19,10341.11 P2.2@9213.19,10341.2
ETXP: J4.48 R7.2 U2.65 | length 3078.7
  Top Layer w10: 9163.02,10680.75 9163.02,10712.92 9193.19,10743.09 9292.75,10743.09 9379.65,10829.99 9379.65,11024.53 9377.56,11026.62 U2.65@9377.56,11046.12
  Bottom Layer w10: v2(9154.02,10667.06) 9154.02,10662.38 9163.02,10653.38 9163.02,10629.98 9221.13,10571.87 9599.21,10571.87 9796.56,10374.52 9796.56,9755.94 9828.36,9724.14 10262.84,9724.14 10300.84,9762.14 10300.84,10028.84 10442.66,10170.66 10540.74,10170.66 J4.48@10588.19,10218.11
ETXP1: P2.1 R7.7 | length 378.1
  Top Layer w10: R7.7@9153.45,10573.61 9153.45,10565.73 9158.29,10560.89 9158.63,10560.89 9163.02,10556.5 9163.02,10446.94 9113.02,10396.94 9113.02,10325.7 9149.5,10289.22 9149.5,10254.89 P2.1@9163.19,10241.2
GND: ?.0 C1.1 C2.1 C3.2 C4.1 C5.2 C6.2 C7.1 C8.1 C9.1 C10.1 C11.1 C12.2 C13.2 C14.1 C21.2 C22.2 C46.2 J2.7 J2.8 J3.5 J3.6 J3.9 J3.20 J3.22 J3.25 J3.26 J4.7 J5.6 J5.7 J7.4 P2.8 P6.0 P6.A1 P6.B1 P7.0 P7.A1 P7.B1 P9.0 P9.A1 P9.B1 PWR.2 R8.1 R9.1 R10.2 R11.2 R20.1 R21.1 R22.1 R23.1 S1.3 S2.3 U1.1 U2.10 U2.19 U2.27 U2.49 U2.74 U2.99 U3.14 Y1.2 Y1.4 | length 30209.4
  Top Layer w8: 8449.49,12720 8582.7,12720 ; v2(8563.81,11518.46) 8642.06,11596.71 8770.12,11596.71 8792.94,11573.89 C4.1@8854.17,11573.89 8867.67,11587.39 8867.67,11603.04 8876.7,11612.06 v1@8876.7,11614.49 ; ?.0@8566.7,12704 8582.7,12720 ; ?.0@8593.78,12639.72 8583.5,12650.01 8583.5,12719.21 8582.7,12720 ; 8630.7,12768 8582.7,12720 ; C1.1@8859.17,11124.89 8843.36,11140.69 8843.36,11179.16 8847.32,11183.11 8942.62,11183.11 8955.04,11170.69 8956.08,11170.69 8982.22,11144.54 U2.49@9023.23,11144.54 ; v1@8883.44,11610.95 8884.95,11610.95 8891.59,11617.59 8903.56,11629.56 8929.89,11629.56 8945.08,11629.56 8997.03,11577.61 U2.27@9023.23,11577.61 9063.34,11577.61 9107.32,11621.59 9225.36,11621.59 9235.8,11632.04 9235.09,11632.76 ; U2.19@9220.08,11676.04 9220.08,11647.76 9235.09,11632.76 ; C7.1@9324.17,12121.69 9383.88,12061.98 9383.88,11868.53 9383.52,11868.17 9383.52,11858.71 v2(9379.89,11855.08) ; 9375.19,11630.24 9375.19,11607.15 9404.73,11577.61 9497.14,11577.61 ; v2(9466.73,11985.02) 9466.73,11981.29 9457,11971.56 9457,11954.73 C46.2@9446.17,11943.9 9454.48,11935.59 9471.77,11935.59 9484.17,11923.19 9484.17,11853.56 9397.25,11766.64 U2.10@9397.25,11676.04 9397.25,11637.06 9392.94,11632.76 9235.09,11632.76 ; v2@9508.84,11276.62 9519,11266.46 9519,11117.82 9554.73,11082.1 U2.74@9554.73,11046.12 9554.73,10918.25 9560.72,10912.26 C2.1@9588.03,10912.26 C2.1@9589.52,10910.76 ; 9511.57,11279.36 9382.02,11279.36 9367.03,11294.35 9367.03,11447.5 9497.14,11577.61 ; 9598.62,11312.49 9598.62,11138.38 9714.74,11022.26 v2(9812.23,11022.26) ; C3.2@9812.17,11609.89 9798.67,11596.39 9798.67,11582.37 9793.91,11577.61 U2.99@9653.15,11577.61 9497.14,11577.61
  Top Layer w9: v1@8882.34,11609.87 cw(c8929.89,11562.32) 8883.44,11610.95 cw(c8929.89,11562.32) 8891.59,11617.59 cw(c8929.89,11562.32) 8929.89,11629.56
  Top Layer w10: C10.1@9015.02,11896.03 9038.57,11896.03 9066.55,11868.05 9066.55,11825.44 v2(9097.97,11794.02) ; v2(9057.21,11637.5) 9059.35,11637.5 9075.25,11621.59 v1@9107.32,11621.59
  Top Layer w15: 9285.67,12121.69 9285.67,12030.13 Y1.2@9323.3,11992.5
  Top Layer w20: v2(7985,12115) 7985,12548.53 8058.1,12621.63 v1@8317.63,12621.63 ; 8037.79,11765.11 8037.79,12134.55 ; J2.7@8087.19,13222 J2.8@8187.19,13222 8225.22,13222 8252.99,13194.23 8252.99,13106.44 v2(8325.38,13034.05) 8570.01,13034.05 8659.47,12944.59 8659.47,12769.19 8636.27,12745.99 ; J3.25@8088.19,11318.11 J3.26@8188.19,11318.11 ; J3.9@8088.19,12118.11 8080.54,12125.76 8046.57,12125.76 8037.79,12134.55 ; J3.26@8180.12,11316.63 8228.81,11316.63 8289.11,11256.33 8289.11,11199.6 8256.6,11167.09 8018.21,11167.09 7933.79,11251.5 7933.79,12585.99 8108.94,12761.14 8559.64,12761.14 8593.81,12795.31 8593.81,12915.54 8533.94,12975.41 v1(8412.92,12975.41) 8291.91,12975.41 8275.25,12992.06 v2(8273.08,12992.06) ; J3.6@8188.19,12318.11 J3.5@8088.19,12318.11 8080.54,12310.46 8046.57,12310.46 8037.79,12301.67 8037.79,12134.55 ; v1(8317.63,12630.67) 8348.38,12630.67 8482.83,12496.21 8711.89,12496.21 v1(8828.53,12612.85) ; v1(8397.87,10011.28) 8397.87,9878.47 P7.0@8453.39,9822.96 ; P7.0@8466.89,9680.45 8467.99,9681.55 P7.0@8467.99,9826.12 8467.99,9839.59 8476.94,9848.53 P7.A1@8505.45,9848.53 ; P7.0@8467.99,9661.55 8802.85,9661.55 P7.0@8804.87,9663.58 ; v1@8485.85,10149.71 8485.85,10122.72 PWR.2@8488.6,10119.96 ; P7.A1@8511.1,9864.31 8474.33,9901.08 8474.33,9985.09 8483.12,9993.88 8649.09,9993.88 8657.88,10002.66 8657.88,10058.31 C13.2@8661.71,10062.14 ; v2(8612.99,10276.06) 8651.73,10276.06 8671.73,10256.06 U1.1@8671.73,10240.25 ; v1(8719.19,11876.38) 8833.87,11876.38 8853.74,11896.26 v2(8894.46,11896.26) ; P7.B1@8764.99,9848.33 8786.92,9848.33 8789.58,9845.67 8799.2,9845.67 8808.15,9836.72 P7.0@8808.15,9826.12 P7.0@8808.15,9661.55 ; P7.B1@8765.04,9864.31 8765.04,9886.95 8780.78,9902.69 8780.78,9903.91 8793.78,9916.91 ; P7.B1@8773.54,9855.16 8780.09,9855.16 ; v1(8789.33,11025) v1@8793.99,11020.34 ; v2(8793.99,10741.66) v1@8793.99,11020.34 ; 8799.89,9916.48 8848.89,9965.48 C12.2@8848.89,10006.83 ; U3.14@8849.36,13315.06 8904.93,13315.06 8942.64,13277.35 9000.45,13277.35 9016.32,13293.22 9016.32,13341.86 C21.2@9013.96,13344.22 ; C1.1@8859.17,11124.89 8793.99,11059.71 v1@8793.99,11020.34 ; v2(8931.27,12085.4) v2@8931.27,12086 ; v2@8937.48,12092.2 v2@8931.27,12086 ; v2(9008.17,11920.63) 9009.7,11919.1 9009.7,11901.35 C10.1@9015.02,11896.03 ; C22.2@9013.96,13412.98 v1(9013.96,13378.6) C21.2@9013.96,13344.22 ; R23.1@9074.6,12058.4 9072.86,12060.14 9072.86,12097.32 9060.94,12109.24 v1(8954.52,12109.24) v2@8931.27,12086 ; P9.B1@9211.22,13329.24 9211.22,13351.88 9209.41,13353.69 9177.06,13353.69 9175.59,13352.22 9021.96,13352.22 C21.2@9013.96,13344.22 ; C8.1@9247.17,12121.69 9285.67,12121.69 C7.1@9324.17,12121.69 ; v2(9251.04,11855.03) 9251.11,11855.09 9251.11,11895.27 Y1.4@9251.17,11895.34 ; C14.1@9267.28,10631.55 9267.46,10631.72 9267.46,10665.02 v2(9267.63,10665.2) ; v2(9321.77,12022.6) 9323.3,12021.07 Y1.2@9323.3,11992.5 ; v1(9322.48,13079.85) 9322.48,13015.36 9418.86,12918.98 9953.54,12918.98 ; v2@9334.36,10492.79 9369.02,10458.13 9451.27,10458.13 9453.49,10455.91 ; 9375.53,10455.91 9453.49,10455.91 ; v1(9435.8,12487.59) 9522.49,12400.9 9522.49,12357.58 ; P9.A1@9465.16,13329.24 9465.16,13351.88 9466.97,13353.69 9499.32,13353.69 9508.27,13362.64 P9.0@9508.27,13367.43 ; P2.8@9513.19,10341.2 9513.19,10396.21 9453.49,10455.91 ; C6.2@9527.17,12121.71 C5.2@9618.17,12121.71 9788.43,12121.71 v1(9818.32,12151.6) v2(9848.21,12181.49) ; C11.1@9582.49,12346.46 C11.1@9582.49,12357.58 ; v2(9716.72,9848.9) 9760.93,9848.9 9783.71,9826.12 P6.0@9868.23,9826.12 9868.23,9852.62 9883.25,9867.64 9909.53,9867.64 9911.34,9865.83 P6.A1@9911.34,9864.31 ; v2(9717.59,9662.45) 9718.04,9662 9867.78,9662 P6.0@9868.23,9661.55 P6.0@10208.39,9661.55 ; C9.1@9720.24,11945.17 9790.7,11945.17 v2(9957.87,12112.34) ; 9934.99,10059.58 9934.99,10151.64 v2(9936.38,10153.02) ; v1(9953.54,12904.27) 9953.54,12918.98 ; v1(10028.38,13363.12) 10028.38,13362.04 10042.48,13347.94 R21.1@10042.48,13238.82 ; v2(10063.84,12922.02) 9956.57,12922.02 9953.54,12918.98 ; v2(10162.34,10136.67) 10162.34,10079.43 10239.15,10002.62 10239.15,9860.71 10229.92,9851.48 10217.34,9851.48 10208.39,9842.53 P6.0@10208.39,9830.91 ; P6.B1@10165.28,9864.31 10165.28,9841.67 10167.09,9839.86 10199.44,9839.86 P6.0@10208.39,9830.91 ; P6.0@10208.39,9826.12 P6.0@10208.39,9830.91 ; J7.4@10288.19,12178.11 10370.33,12178.11 10410.33,12218.11 J4.7@10488.19,12218.11
  Top Layer w30: J3.22@8188.19,11518.11 J5.7@8388.19,11518.11 ; J3.20@8188.19,11618.11 J5.6@8388.19,11618.11 ; C2.1@9589.52,10910.76 v1(9688.28,10910.76)
  Bottom Layer w8: J5.7@8388.19,11518.11 8564.17,11518.11 8871.73,11210.55 8944.83,11210.55 8956.08,11199.3 v2@8956.08,11170.69 ; v2(9321.77,12022.6) 9379.89,11964.49 v2(9379.89,11855.08) 9379.89,11630.38 v2@9362.58,11613.07 ; v2(9466.73,11985.02) 9466.73,12026.56 v2(9561.62,12121.45) ; 9511.57,11279.36 9565.49,11279.36 9598.62,11312.49 ; v1(9688.28,10910.76) 9697.89,10910.76 9809.38,11022.26 v2(9812.23,11022.26)
  Bottom Layer w10: v2(9057.21,11637.5) 9097.97,11678.25 v2(9097.97,11794.02)
  Bottom Layer w20: 7928.84,12113.52 7929.58,12114.26 7984.26,12114.26 v2(7985,12115) 7986.85,12116.85 8086.93,12116.85 J3.9@8088.19,12118.11 ; 8045.43,11669.41 8136.89,11669.41 J3.20@8188.19,11618.11 ; J2.8@8187.19,13222 8275.09,13222 8304.74,13251.66 8304.74,13374.81 8342.54,13412.61 8464.05,13412.61 8519.72,13356.94 8519.72,13087.55 8603.42,13003.85 ; J3.26@8188.19,11318.11 8243.21,11373.12 8243.21,11463.1 J3.22@8188.19,11518.11 ; v2(8273.08,12992.06) 8315.07,13034.05 v2(8325.38,13034.05) ; P7.0@8467.99,9826.12 8467.99,9842.53 8496.06,9870.6 8527.21,9870.6 8598.21,9799.6 8674.91,9799.6 8710.83,9835.52 8799.2,9835.52 8806.13,9842.44 P7.0@8806.13,9842.71 ; v1@8486.58,10157.05 8485.85,10156.32 8485.85,10115.74 8526.64,10074.96 R8.1@8578.92,10074.96 ; R9.1@8747.16,10083.27 8761.2,10083.27 8761.2,10098.37 8856.01,10193.19 8856.01,10406.35 8980.53,10530.86 8982.06,10530.86 8983.84,10532.64 8983.84,10534.17 8985.37,10534.17 8985.91,10534.71 8985.91,10536.46 8985.99,10536.54 8985.99,10631.73 8985.91,10631.81 8985.91,10633.81 8985.99,10633.89 8985.99,10634.5 8976.82,10643.66 8976.82,10741.44 ; v2(8793.99,10741.66) 8976.6,10741.66 8976.82,10741.44 ; v2(8894.46,11896.26) 8918.84,11920.63 8942.86,11920.63 ; v2(8931.27,12085.4) 8931.27,11932.22 8942.86,11920.63 ; 8983.92,10686.57 9178.1,10492.39 v2(9333.96,10492.39) ; v2(9008.17,11920.63) 8942.86,11920.63 ; S2.3@9143.11,12706.69 9211.64,12638.16 9335.28,12638.16 ; 9145.3,12212.98 9321.77,12036.51 v2(9321.77,12022.6) 9321.77,11925.76 v2(9251.04,11855.03) ; 9150.91,10760.92 8985.61,10760.92 8976.82,10752.13 8976.82,10741.44 ; P9.0@9168.11,13367.43 P9.0@9168.11,13532 P9.0@9508.27,13532 P9.0@9508.27,13367.43 9508.27,13342.63 9523.59,13327.31 9523.59,13087.69 9514.8,13078.91 9435.23,13078.91 ; 9200.91,10760.92 9239.16,10722.67 9267.63,10694.2 v2(9267.63,10665.2) ; 9217.63,10665.2 v2(9267.63,10665.2) ; 9578.82,12354.65 9381.81,12354.65 9340.36,12396.09 9340.36,12633.08 9335.28,12638.16 ; v2(9716.72,9848.9) 9717.59,9848.04 v2(9717.59,9662.45) ; v2(9848.21,12181.49) 9914,12115.69 10105.5,12115.69 10167.92,12178.11 J7.4@10288.19,12178.11 10442.17,12178.11 10482.17,12218.11 J4.7@10488.19,12218.11 ; P6.0@9868.23,9826.12 9868.23,9853.02 9839.12,9882.12 9839.12,10226.26 9876.47,10263.62 9933.71,10263.62 ; R20.1@9937.83,10078.77 9937.1,10079.49 v2@9937.1,10152.3 ; v2(10063.84,12922.02) 10063.84,12852.43 9914.23,12702.82 9796.98,12702.82 S1.3@9793.11,12706.69 9724.58,12638.16 9335.28,12638.16 ; R22.1@10157.21,10078.77 10157.21,10129.38 10162.34,10134.51 v2(10162.34,10136.67) 9952.73,10136.67 v2@9937.1,10152.3 ; v2(9267.63,10665.2) 9588.03,10665.2 9933.71,10319.51 9933.71,10263.62 ; 9933.71,10263.62 9936.38,10260.95 v2(9936.38,10153.02) v2@9937.1,10152.3
  Bottom Layer w30: J5.7@8388.19,11518.11 J5.6@8388.19,11618.11
  other v1: 8914.47,9602.67 8717.82,9613.08 8311.14,9618.43 8643.62,9625.6 8885.81,9642.8 8593.46,9645.66 9596.86,9662.15 9978.48,9662.15 10103.52,9662.96 9164.24,9664.28 9449.08,9664.59 9358.01,9666.66 8342.67,9710.15 9733.23,9821.63 9735.83,9883.16 8341.73,9932.24 8878.09,9948.32 8357.99,9979.62 9845.22,9990.22 8435.78,9994.23 10079.25,10020.88 9997.44,10022.96 8860.4,10043.46 8409.83,10056.13 10087.05,10058.34 9246,10063.59 9844.71,10074.41 9997.44,10078.01 9294.46,10092.57 10271.23,10105.31 10106,10124.31 9997.44,10133.06 9206.42,10136.95 9384.56,10140.8 10282.74,10149.08 8485.85,10157.38 10105.42,10168.15 10686.93,10180.38 9997.44,10188.12 10077.84,10193.71 10179.95,10194.05 10300.41,10199.67 9846.02,10202.35 8457.79,10220.85 9997.44,10243.17 10077.84,10248.77 8428.08,10255.07 10220.1,10264.72 8985.14,10266.43 10689.24,10266.46 8473.1,10271.28 9849.21,10289.28 9997.44,10298.22 10077.84,10303.82 8434.38,10322.61 8482.1,10331.61 10298.8,10341.01 9847.61,10353.08 9997.44,10353.27 10191.19,10357.07 10077.84,10358.87 8985.14,10366.98 10689.24,10382.19 9997.44,10408.33 10077.84,10413.92 9493.32,10429.88 9841.75,10439.07 9415.84,10440.37 10176.74,10442.2 10686.93,10460.22 9997.44,10463.38 10077.84,10468.98 9228.26,10469.79 9360.96,10475.32 9211.37,10495.58 9776.78,10501.25 9997.44,10518.43 10077.84,10524.03 8985.14,10532.86 9926.47,10547.92 9711.82,10560.64 10687.5,10563.96 9997.44,10573.49 10077.84,10579.08 8828.02,10599.44 8862.87,10616.67 9524.84,10621.02 9904.91,10622.97 9678.45,10624.9 9997.44,10628.54 9236.58,10630.86 8985.14,10633.66 10077.84,10634.13 9499.42,10638.14 9624.4,10637.69 9791.03,10659.2 9316.23,10662.28 9962.92,10664 10689.24,10671.51 9626.07,10686.7 10077.84,10689.19 9037.8,10696.14 9577.03,10704.42 9923.58,10704.01 9783.27,10710.96 8754.88,10717.02 8985.14,10720.55 10043.32,10724.64 9884.23,10744.02 9409.21,10758.01 9680.61,10761.86 10003.98,10764.66 9033.89,10766.9 8797.61,10772.38 9445.88,10771.95 9844.89,10784.03 10689.24,10787.23 9964.63,10804.67 9805.54,10824.04 9925.29,10844.68 10689.01,10857.79 9766.2,10864.06 8833.76,10874.35 9273.36,10874.6 8799.36,10879.18 9885.94,10884.69 9726.85,10904.07 9290.59,10906.36 8856.95,10913.01 9846.6,10924.71 9679.4,10952.79 10689.24,10960.82 9807.26,10964.72 9770.44,10992.49 9015.48,11010.37 9059.87,11012.55 9625.99,11013.27 8825.67,11023.09 9733.88,11025.15 8858.56,11030.23 9604.18,11033.21 9707.07,11050.98 10746.56,11063.56 10689.24,11076.55 9669.54,11087.54 9539.3,11100.13 9097.41,11147.8 8975.22,11154.54 9600.62,11168.51 9513.57,11176.08 9127.58,11177.12 10689.24,11192.28 9163.7,11210.7 9513.57,11219.37 9600.62,11220.72 10686.64,11266.19 8286.52,11267.69 9600.62,11272.93 9397.12,11276.1 9371.88,11287.94 8259.52,11290.19 9513.57,11305.93 9513.57,11349.22 10752.08,11360.8 10689.24,11365.87 9600.62,11377.35 10745.77,11461.71 10689.24,11481.6 8593.07,11542.56 8608.06,11566.77 8826.58,11567.2 10690.59,11586.28 9173.15,11614.34 8879.7,11616.49 9112.14,11622.13 9337.5,11630.83 9911.1,11640.01 9867.94,11640.63 9958.57,11640.63 10000.5,11641.24 9010.8,11647.38 10726.06,11668.28 10687.43,11676.16 10116.4,11756.35 9054.45,11761.42 9029.59,11769.47 10689.24,11770.92 10046.05,11781.55 8929.87,11796.66 9958.83,11798.14 9076.89,11815.77 10169.67,11816.32 8716.2,11818.74 9364.57,11821.17 8949.14,11823.83 10082.9,11827.62 8895.34,11829.11 9982.17,11835.6 10205.74,11849.73 8702.16,11857.6 8912.13,11863.78 10747.35,11871.69 10028.23,11873.07 10132.65,11876.75 10689.24,11886.64 8987.02,11896.03 9251.17,11930.93 8986.92,11948.93 9325.98,11950.3 8287.61,11957.53 8247.69,11962.28 10741.83,11971.82 8519.17,11983.18 9846.41,11986.08 8905.3,12006.32 9487.17,12009.92 9575.42,12011.7 9878.1,12019.76 9845.08,12043.53 8913.04,12045.94 10689.24,12060.23 8519.17,12065.28 10751.29,12068 9575.23,12090.54 9897.25,12093.05 9080.53,12102.74 9398.86,12105.04 9641.69,12114.55 9391.87,12140.53 10016.75,12153.79 9364.75,12159.18 9969.88,12161.05 8448,12175.16 8538.68,12177.74 8392.09,12185.71 7982.29,12196.21 8574.89,12207.19 8949.54,12249.05 10752.08,12264.32 9926.59,12269.85 10077.76,12272.89 8650.22,12274.31 7984.82,12277.27 10039.73,12277.77 8940.9,12283.15 9901.1,12296.47 9958.84,12296.85 8680.16,12298.45 9231.85,12317.7 9112.07,12320.7 9148.82,12320.7 9787.8,12323.02 9474.43,12350.94 9804.63,12350.51 7982.29,12375.22 9501.04,12396.63 9757.09,12416.68 9963.12,12420.62 10037.32,12422.2 9902.34,12423.78 9814.72,12424.57 8617.54,12428.53 9537.66,12438.46 8341.41,12455.89 7982.29,12465.57 10687.43,12466.15 8556.04,12475.9 9360.92,12485.2 9911.38,12496.41 9403.14,12535.96 9243.93,12568.55 9866.76,12580.92 7944.3,12588.85 9462.06,12606.16 8450.01,12612.38 9783.21,12616.99 9242.67,12627.47 7986.51,12627.69 10301.31,12633.95 9665.47,12637.88 8112.86,12640.38 8277.49,12652.26 9415.68,12657.56 8340.29,12673.48 10464.32,12675.11 8426.84,12677.72 8145.96,12679.42 8811.1,12678.83 8039.88,12682.81 8380.93,12690.68 9653.7,12700.1 10683.31,12703.1 8081.46,12726.09 9235.15,12737.8 8669.54,12757.49 8799.89,12768.46 8657.24,12790.67 9410.03,12880.42 8927.2,12883.17 9032.36,12884.01 9161.07,12884.01 9268.75,12884.01 9508.56,12884.1 9650.36,12884.1 9735.07,12885.02 10677.6,12885.84 10495.73,12890.99 10753.96,12895.28 9883.02,12899.46 8672.11,12924.25 7911.14,12952.78 8464.49,12974.28 8353.04,12976.28 8648.48,12980.1 9002.08,12990.28 8809.98,12996.06 8616.07,13007.04 8853.83,13013.47 10755.44,13014.33 8949.29,13018.77 8373.19,13033.02 8409.78,13033.02 8559.56,13035.04 10177.97,13037.17 8915.63,13048.35 7911.14,13062.89 10755.44,13069.38 9360.34,13081.35 9186.15,13085.7 9135.16,13086.88 9244.52,13089.63 9069.35,13104.67 10755.44,13124.43 10198.28,13126.34 9032.59,13137.87 8914.12,13157.75 9151.17,13169.3 9206.54,13169.18 9003.54,13171.67 7911.14,13172.99 10755.44,13179.49 9106.11,13184.12 10193.17,13186.71 8915.73,13193.25 9676.66,13200.22 9152,13208.95 9077.06,13216.73 10248.44,13219.87 8313.45,13235.46 10755.44,13234.54 9044.45,13253.49 9133.78,13262.23 8303.24,13268.77 9663.84,13280.97 7911.14,13283.1 8916.81,13284.16 10755.44,13289.59 9098.27,13307.97 10345.43,13309.08 10221.7,13309.99 10114.45,13312.57 8732.11,13324.76 7911.14,13338.15 10755.44,13344.64 9830.62,13351.31 9938.85,13364.1 9624.12,13366.22 10151.12,13374.35 10081.34,13380.09 10307.77,13389.25 10238.93,13389.84 10367.51,13389.86 8726.38,13391.64 7911.14,13393.2 10755.44,13399.7 9675.48,13403.8 9587.18,13411.01 9067.81,13430.82 7911.14,13448.26 9019.27,13451.78 10755.44,13454.75 9068.91,13495.35 9251.53,13499.86 7911.14,13503.31 9620.29,13519.61 9306.59,13527.76 9392.48,13534.36 9671.28,13548.09 8360.3,13596.05 8415.36,13596.05 8470.41,13596.05 8525.46,13596.05 8580.51,13596.05 8635.57,13596.05 8690.62,13596.05 8745.67,13596.05 8800.72,13596.05 8855.78,13596.05 8910.83,13596.05
  other v2: 8953.08,11174.69 9511.57,11264.65 9598.62,11327.14 9365.33,11614.64 9017.85,13305.1
KEY: J3.23 R24.1 S2.1 | length 2251.2
  Top Layer w8: J3.23@8088.19,11418.11 8013.41,11492.89 8013.41,12548.66 8055.28,12590.53 8328,12590.53 8578.9,12339.63 8578.9,12326.54 8580.59,12324.84 8678.58,12324.84 S2.1@8883.27,12529.53
LED1: J3.19 LED1.2 | length 1906.1
  Top Layer w8: J3.19@8088.19,11618.11 8139.91,11566.39 8413.44,11566.39 8641.88,11794.83 8641.88,12125.42 8922.59,12406.13 9374.52,12406.13 9394.52,12386.14 LED1.2@9394.52,12357.58
LED2: J3.21 LED2.2 | length 2237.1
  Top Layer w8: J3.21@8088.19,11518.11 8036.86,11569.44 8036.86,11660.69 8051.29,11675.13 8486.11,11675.13 8617.91,11806.93 8617.91,12132.79 8911.39,12426.27 9409.67,12426.27 9440.03,12395.91 9440.03,12297.13 9427.33,12284.43 LED2.2@9394.52,12284.43
LED_CON: R13.1 U3.5 | length 1744.4
  Top Layer w10: U3.5@8629.36,13215.06 8693.37,13215.06 8720.94,13187.49 v2(8720.94,12926.77) ; v2(10040.74,12992.29) 10040.74,13023.58 R13.1@10042.48,13025.32
  Bottom Layer w10: v2(8720.94,12926.77) 9975.21,12926.77 v2(10040.74,12992.29)
LED_RUN: R14.1 U3.4 | length 1786.3
  Top Layer w10: U3.4@8629.36,13265.06 8714.38,13265.06 8755,13224.44 v2(8755,12960) ; R14.1@10042.48,13132.07 10042.73,13131.82 v2(10042.73,13097.44)
  Bottom Layer w10: v2(8755,12960) 9777.22,12960 9905.29,12960 v2(10042.73,13097.44)
NC: J4.44 U2.73 | length 2384.9
  Top Layer w8: U2.73@9535.04,11046.12 9535.04,10828.81 9879.17,10484.68 v2(9879.17,10122.73)
  Bottom Layer w8: v2(9879.17,10122.73) 9875.53,10119.1 9875.53,10111.09 9873.72,10109.28 9873.72,9926.65 9937.01,9863.36 10151.05,9863.36 10227.09,9939.4 10227.09,10195.75 10402.45,10371.11 10541.19,10371.11 J4.44@10588.19,10418.11
NetC12_1: C12.1 F2.2 U1.3 | length 223.8
  Top Layer w30: F2.2@8751.22,10115.44 8751.91,10116.13 8848.2,10116.13 C12.1@8848.89,10116.83 8846.31,10119.41 8846.31,10237.67 U1.3@8843.73,10240.25
NetD1_2: D1.2 R14.2 | length 165.8
  Top Layer w10: D1.2@9816.09,13132.07 R14.2@9981.85,13132.07
NetD2_2: D2.2 R13.2 | length 165.8
  Top Layer w10: D2.2@9816.09,13025.32 R13.2@9981.85,13025.32
NetD3_2: D3.2 R21.2 | length 163.8
  Top Layer w10: D3.2@9816.09,13238.82 9979.5,13238.82 R21.2@9979.75,13239.07
NetJ1_2: J1.2 R16.1 | length 130.6
  Top Layer w20: J1.2@9918.79,13512.1 9919.04,13511.86 10048.97,13511.86 R16.1@10049.21,13511.61
NetJ3_3: J3.3 R6.2 | length 358.5
  Top Layer w8: J3.3@8088.19,12418.11 8136.63,12369.67 8269.95,12369.67 8365.54,12274.08 8366.52,12274.08 8380.33,12260.28 R6.2@8380.33,12259.29
NetJ3_4: J3.4 R5.1 | length 229.8
  Top Layer w8: J3.4@8188.19,12418.11 8291.08,12418.11 8365.94,12343.25 8366.52,12343.25 8380.33,12329.44 R5.1@8380.33,12328.46
NetJ3_10: J3.10 J5.1 | length 200
  Top Layer w8: J3.10@8188.19,12118.11 J5.1@8388.19,12118.11